# Altium PCB version2.1.PcbDoc
Units mm, origin at the board's own origin, x right, y up, seen from the top; angles counter-clockwise.
Board outline 28.95 x 49.45 mm, 2 copper layers (Top Layer, Bottom Layer); 2 components, 16 nets, 36 pads, 4 vias.
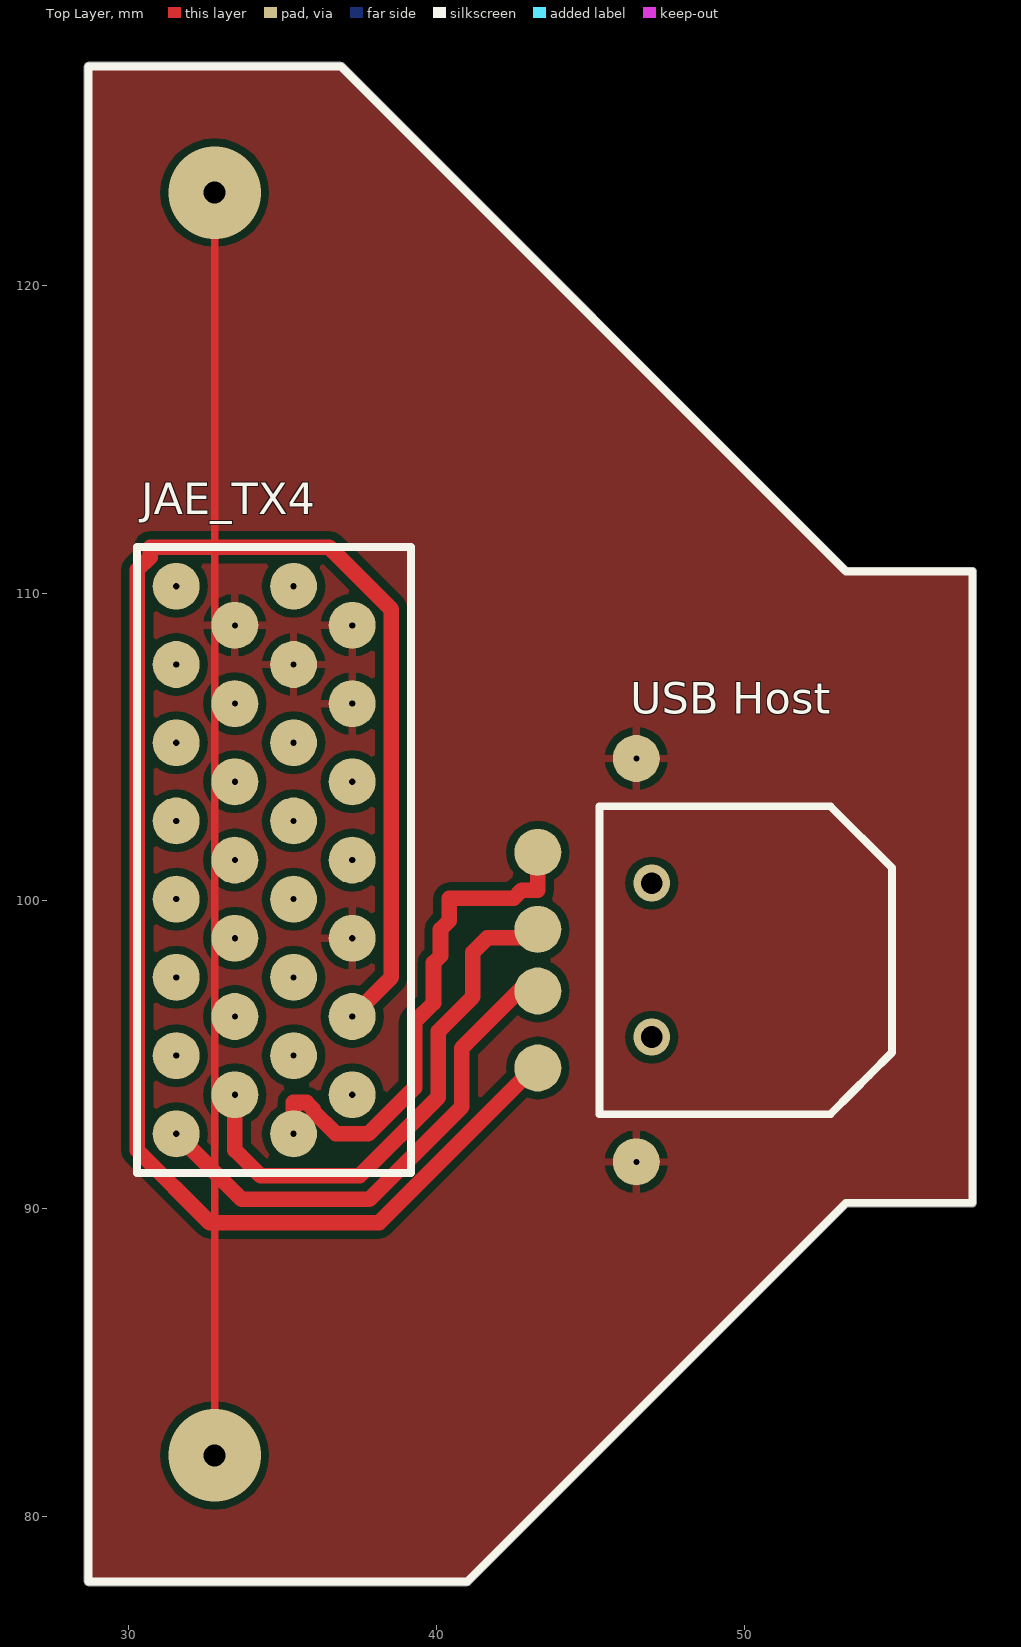
[diagram p0: Top Layer view]
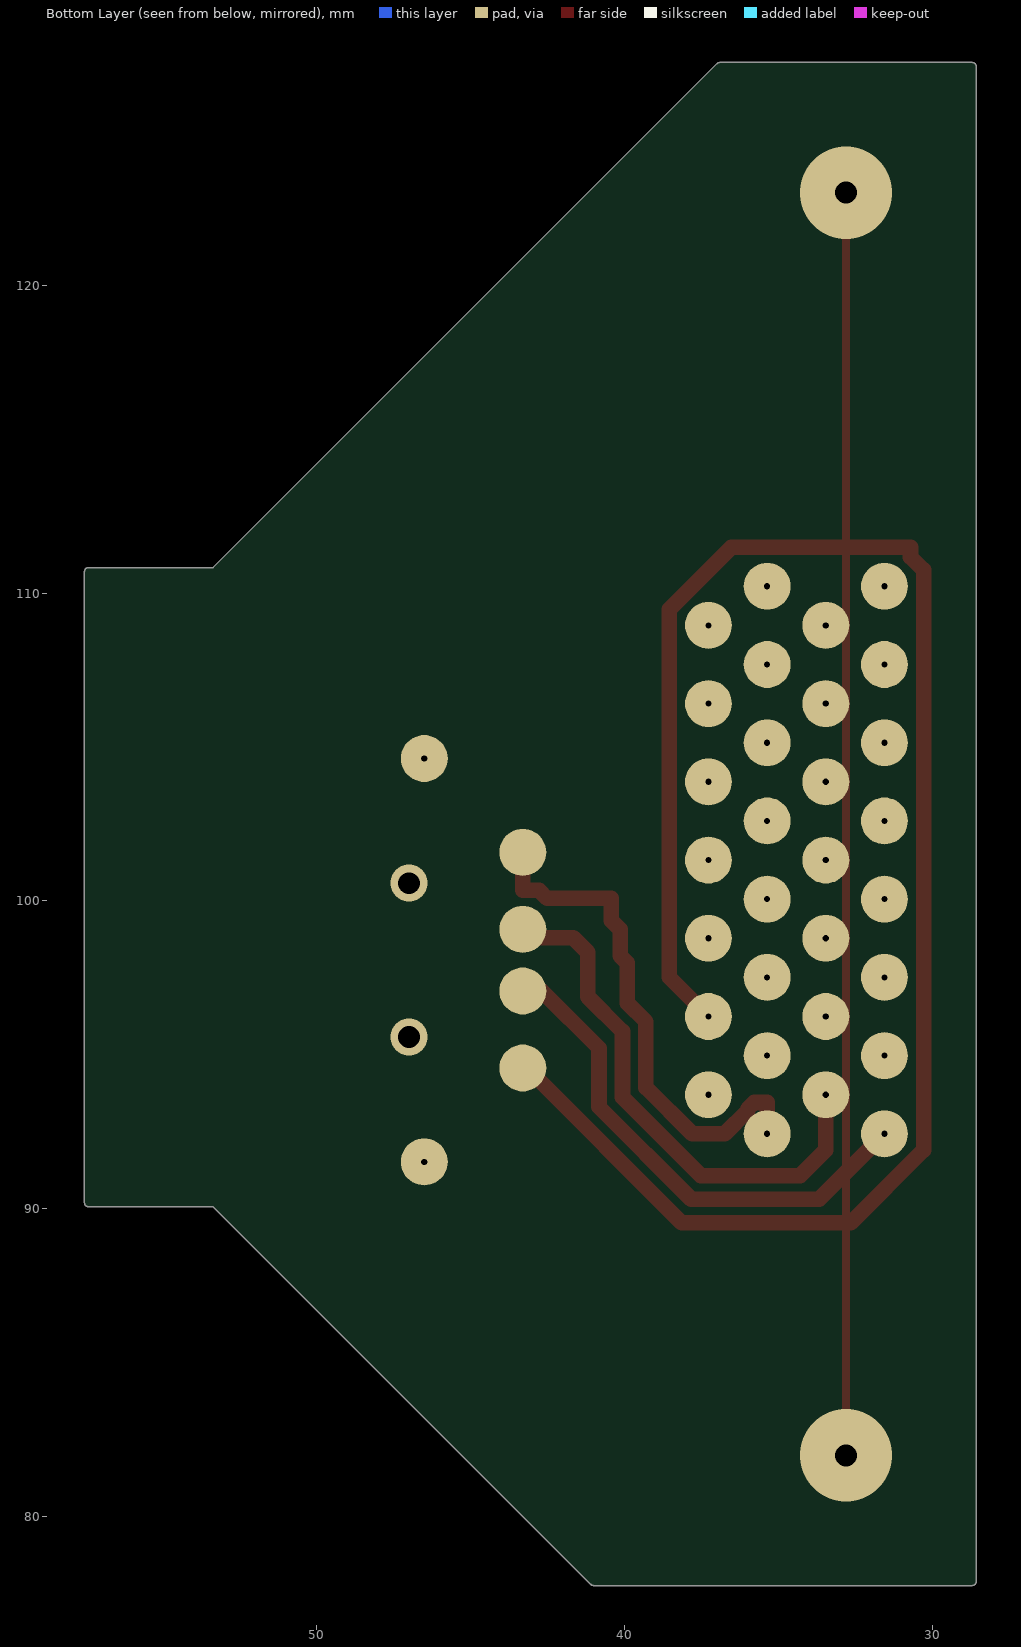
[diagram p1: Bottom Layer view, seen from below]

## Layer stack, top to bottom
Top Solder: solder mask 0.0102, Solder Resist, Dk 3.5
Top Layer: signal copper 0.0356
Dielectric 1: dielectric 0.32, FR-4, Dk 4.8
Bottom Layer: signal copper 0.0356
Bottom Solder: solder mask 0.0102, Solder Resist, Dk 3.5

## Board outline
28.573,77.9 28.573,127.1 cw(c28.7,127.1) 28.7,127.227 36.9,127.227 cw(c36.9,127.1) 36.991,127.19 36.99,127.19 53.353,110.827 57.4,110.827 cw(c57.4,110.7) 57.527,110.7 57.527,90.2 cw(c57.4,90.2) 57.4,90.073 53.353,90.073 41.09,77.81 cw(c41,77.9) 41,77.773 28.7,77.773 cw(c28.7,77.9)

## Design rules (kind name [scope] priority, off if disabled: settings)
Clearance [All] p1: gap=0.254
DiffPairsRouting DiffPair_DiffPairsRouting [InDifferentialPair ('data')] p1: maxlimit=0.762 minlimit=0.254 mostfreqgap=0.254 toplayer_minwidth=0.381 toplayer_maxwidth=0.508 toplayer_prefwidth=0.508 bottomlayer_minwidth=0.381 bottomlayer_maxwidth=0.508 bottomlayer_prefwidth=0.508 maxuncoupledlength=12.7
DiffPairsRouting [All] p2: maxlimit=0.254 minlimit=0.254 mostfreqgap=0.254 toplayer_minwidth=0.381 toplayer_maxwidth=0.381 toplayer_prefwidth=0.381 bottomlayer_minwidth=0.381 bottomlayer_maxwidth=0.381 bottomlayer_prefwidth=0.381 maxuncoupledlength=12.7
MatchedLengths DiffPair_MatchedLengths [InDifferentialPair ('data')] p1: tolerance=25.4 checknetsindiffpair=FALSE checkdiffpairvsdiffpair=TRUE checkxsignals=TRUE checkothers=TRUE
PolygonConnect [All] p1: connectstyle=Relief reliefconductorwidth=0.254 reliefentries=4 polygonreliefangle="90 Angle" airgapwidth=0.254
RoutingVias [All] p1: holewidth=0.711 width=1.27 viastyle="Through Hole" minholewidth=0.711 minwidth=1.27 maxholewidth=0.711 maxwidth=1.27
SolderMaskExpansion [All] p1: expansion=0.102
Width [All] p1: maxlimit=0.762 minlimit=0.381 preferedwidth=0.508
29 further rules are at their usual default settings.

## Classes and differential pairs
differential pair data: +D_P -D_N

## Components (designator, comment, footprint, x,y, rotation, side; value= is the part's Value field where it differs from the comment)
JAE_TX4 "30 pin" TX_24 31.551,92.439 r0 top
"USB Host" "USB" "USB 2.0 SMD" 43.293,98.077 r90 top (schematic designator "USB Type A")

## Footprints (in the part's own frame and the unit in brackets; to place one, negate y for a bottom-side part, rotate by r counter-clockwise, add the part's x,y. Pads: shape width x height; smd on the part's side, far side on the other; paste and mask are expansions set on the pad)
TX_24 [mil]
  round 60 hole 7.87: 1(0,0) 2(75,50) 3(0,100) 4(75,150) 5(0,200) 6(75,250) 7(0,300) 8(75,350) 9(0,400) 10(75,450) 11(0,500) 12(75,550) 13(0,600) 14(75,650) 15(0,700) 16(150,0) 17(225,50) 18(150,100) 19(225,150) 20(150,200) 21(225,250) 22(150,300) 23(225,350) 24(150,400) 25(225,450) 26(150,500) 27(225,550) 28(150,600) 29(225,650) 30(150,700)
  silkscreen extent -50,-50 300,750
"USB 2.0 SMD" [mil] "Type A"
  round 60 all layers, no hole: 1(-137.8,0) 2(-39.37,0) 3(39.37,0) 4(137.8,0)
  round 60 hole 7.87: Sheild_1(-257.87,-125.98) Shield_2(257.87,-125.98)
  silkscreen extent -197,-453 197,-79

## Part data
JAE_TX4: library part JAE_TX4
"USB Host": library part Component_1

## Via types
v1: diameter 3, hole 0.711, Top Layer to Bottom Layer, 2 vias
v2: diameter 1.2, hole 0.711, Top Layer to Bottom Layer, 2 vias

## Nets (pads, with @x,y where several pads share a name; then routed paths per layer and width w, separated by ;. In a path a pad name is that pad's centre, name@x,y a point inside that pad or via, vN(x,y) a via of type N, cw(c..) or ccw(c..) an arc to the next point about the centre after c; other vN are vias at no path point)
+5V: JAE_TX4.17
BATT: JAE_TX4.15
"BUS ID": JAE_TX4.23
CANH1: JAE_TX4.12
CANL1: JAE_TX4.13
D_N: "USB Host.2" JAE_TX4.1 | length 16.5
  Top Layer w0.508: JAE_TX4.1 33.675,90.315 37.823,90.315 40.822,93.314 40.822,95.222 42.677,97.077 43.293,97.077
D_P: "USB Host.3" JAE_TX4.2 | length 17.4
  Top Layer w0.508: JAE_TX4.2 33.456,91.914 34.293,91.077 37.507,91.077 40.06,93.63 40.06,95.767 41.185,96.892 41.185,98.335 41.656,98.806 43.021,98.806 43.293,99.077
GND: "USB Host.Sheild_1" "USB Host.Shield_2" JAE_TX4.14 JAE_TX4.21 JAE_TX4.27 JAE_TX4.28 JAE_TX4.29
SER2CT: JAE_TX4.25
SER2RT: JAE_TX4.10
SER2RX: JAE_TX4.26
SER2TX: JAE_TX4.11
SER5RX: JAE_TX4.24
SER5TX: JAE_TX4.9
USB_5V: "USB Host.1" JAE_TX4.19 | length 58.1
  Top Layer w0.508: JAE_TX4.19 38.536,97.519 38.536,109.475 36.522,111.489 30.705,111.489 30.705,111.169 30.281,110.745 30.281,91.913 32.641,89.553 38.139,89.553 43.163,94.577
USB_GND: "USB Host.4" JAE_TX4.16 | length 16.8
  Top Layer w0.508: JAE_TX4.16 35.361,93.455 35.781,93.455 35.996,93.241 35.996,93.183 36.74,92.439 37.792,92.439 39.298,93.945 39.298,96.082 39.905,96.689 39.905,97.99 40.132,98.218 40.132,99.075 40.423,99.366 40.423,100.085 42.505,100.085 42.767,100.347 43.293,100.347 43.293,101.577
pads on no net: JAE_TX4.3 JAE_TX4.4 JAE_TX4.5 JAE_TX4.6 JAE_TX4.7 JAE_TX4.8 JAE_TX4.18 JAE_TX4.20 JAE_TX4.22 JAE_TX4.30
copper on no net: | length 41
  Top Layer w0.254: v1@32.766,122.966 v1(32.8,123) v1(32.8,82)
  other v2: 46.993,95.577 46.993,100.577

## Polygon pours and split planes (outlines as drawn)
GND on Top Layer "Top Layer-No Net" (solid, pour order 0): 28.7,127 36.8,127 45.305,118.495 53.3,110.7 57.35,110.65 57.35,98.35 57.35,90.2 53.3,90.2 51.364,88.264 41,77.9 28.7,77.9

## Silkscreen, mask and mechanical layers (free items; w line width, h text height)
Top Overlay:
  lines w0.254: 28.7,77.9 41,77.9 53.3,90.2 57.4,90.2 57.4,110.7 53.3,110.7 36.9,127.1 28.7,127.1 28.7,77.9